# Altium PCB LEOPARD_HD4.PcbDoc (part 2 of 3)
Units mil, origin at the board's own origin, x right, y up, seen from the top; angles counter-clockwise.
Board outline 2678.03 x 1898.03 mil, 4 copper layers (L1, L2, L3, L4), stack 207.302 mil thick; 147 components, 116 nets, 618 pads, 284 vias.
Unrouted connection lines stored in the file: 3.
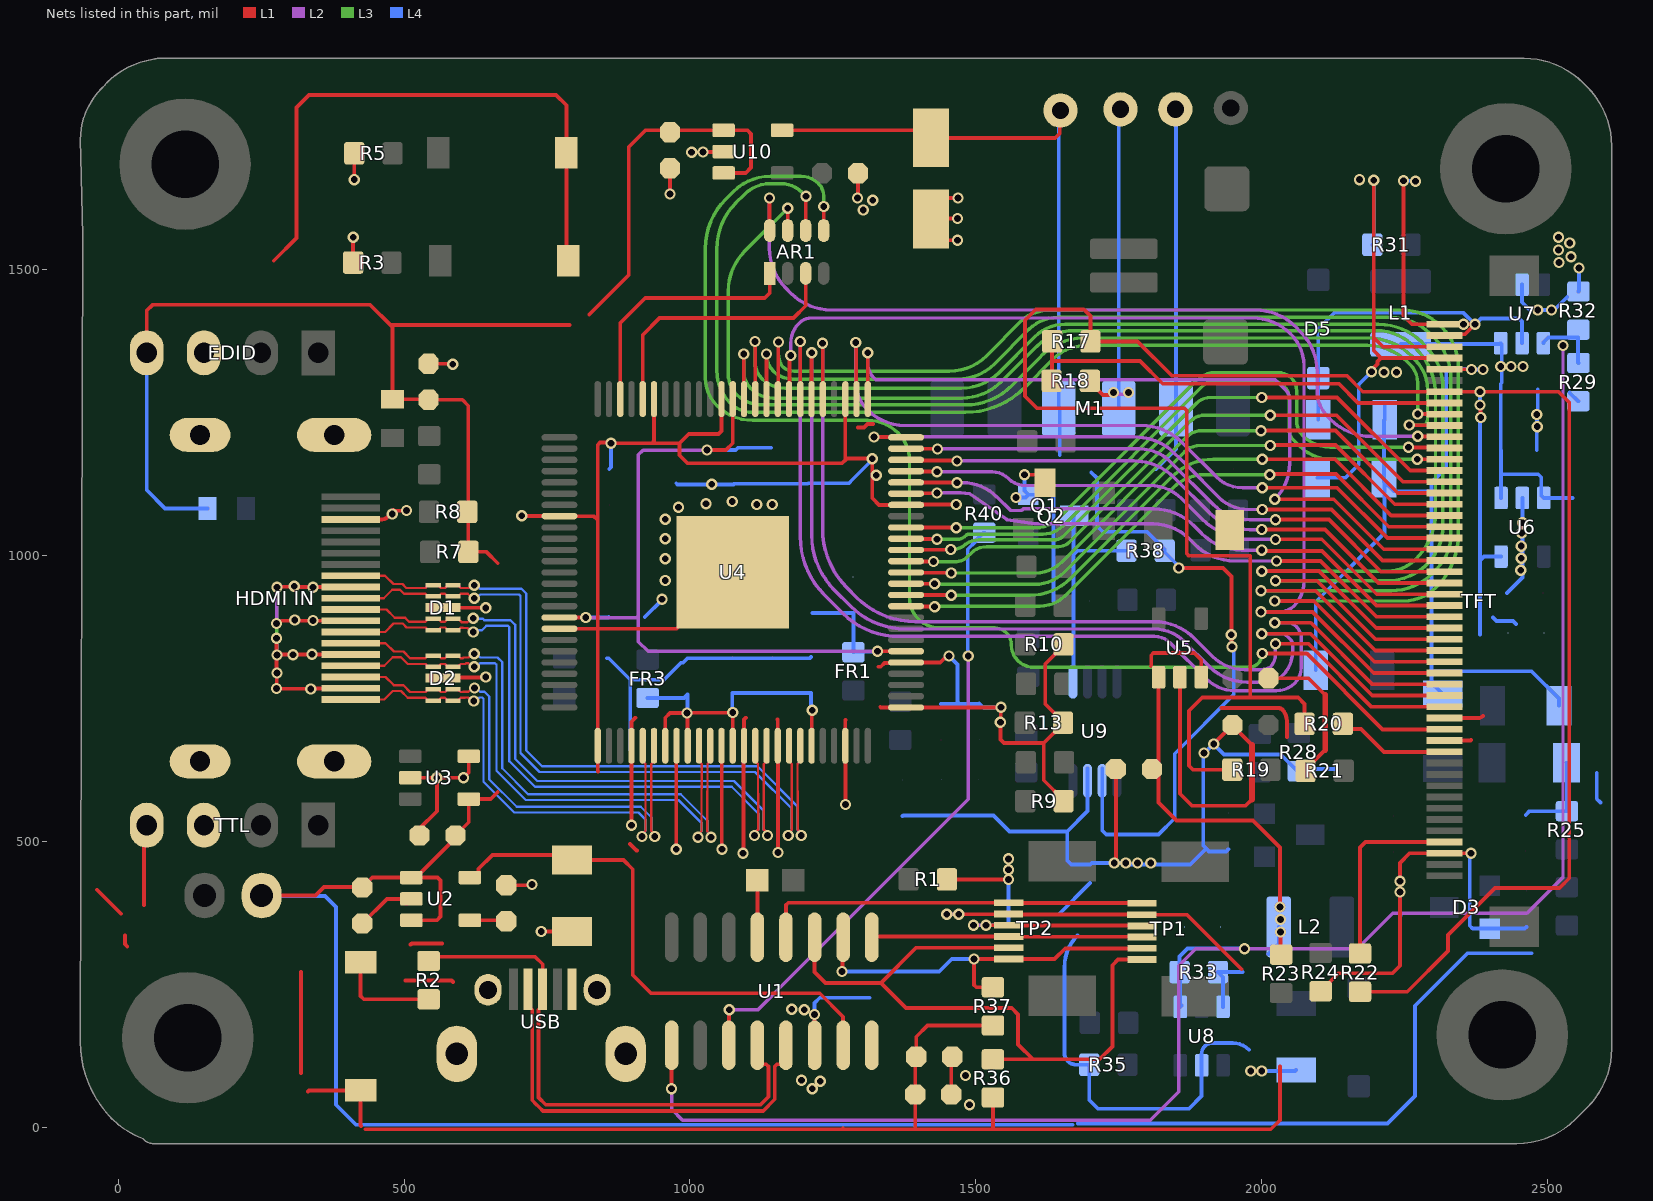
[diagram p4: the nets of this part, all layers, seen from the top]

## Via types
v1: diameter 19.68, hole 11.81, L1 to L4, tented both sides, 252 vias
v2: diameter 39.37, hole 27.56, L1 to L4, tented both sides, 32 vias

## Nets (pads, with @x,y where several pads share a name; then routed paths per layer and width w, separated by ;. In a path a pad name is that pad's centre, name@x,y a point inside that pad or via, vN(x,y) a via of type N, cw(c..) or ccw(c..) an arc to the next point about the centre after c; other vN are vias at no path point)
3V3L: C31.1 R17.2 R19.1 R20.2 R22.2 TFT.7 U6.5 | length 4323.9
  L1 w6.64: R19.1@1948.54,626.97 R19.1@1948.54,625 1880,625 1873,632 1873,728 1896,751 1980,751 ; R20.2@2075,705 2075,740 2064,751 1980,751 ; R22.2@2172,236.54 2254.54,236.54 2326,308 2326,336 2408,418 2521,418 2538,435 2538,1267 2518.92,1286.08 TFT.7@2319.54,1286.08 2176.92,1286.08 2149,1314 1843,1314 1783,1374 R17.2@1700.46,1374 1700.46,1418.54 1689,1430 1605,1430 1586,1411 1586,1278 1607,1257 1865.11,1257 1869,1253.11 1869,1002.89 1872.89,999 1980,999 1980,751 ; v1(2382,1263) 2382.5,1262.5 2382.5,1241.5 v1(2383,1241)
  L4 w6.64: 2382,861.27 2382,991 ; v1@2382,1241 2382,991 ; v1(2382,1263) v1(2382,1286) ; 2404.66,891.17 2410.66,885.17 2439.38,885.17 2444.66,879.9 ; U6.5@2418.6,997.82 2388.82,997.82 2382,991
3V3M: BOOT.2 C1.1 C2.1 C3.1 OFF/ON.1 R36.2 R37.2 RST.2 TP1.5 TP2.5 TTL.4 U1.15 U1.16 U2.5 | length 5139.6
  L1 w6.64: -37,415 5,373 ; 12,335 12,319.89 15.89,316 ; 45,388 45,489 TTL.4@50,494 ; 272,1515 312,1555 312,1783 334,1805 766,1805 784,1787 RST.2@784,1704 784,1525 OFF/ON.1@794,1515 ; 320,94 320,271 ; 332,62 334,64 BOOT.2@424,64 424,3 425,2 ; 432,-4 1266,-4 ; U2.5@615.18,436.4 621.97,436.4 630.47,444.89 630.47,451.69 654.78,476 785,476 C3.1@794,467 884,467 900,451 900,266 932,234 1227,234 1268,193 U1.15@1268,143 ; 1268,-2 1266,-4 ; v1(1470,372) 1470.2,372.2 1557.2,372.2 TP2.5@1557.4,372.4 1557.9,371.9 1789.9,371.9 TP1.5@1790.4,371.4 1869.6,371.4 1965,276 ; R36.2@1530,51.54 1530,-3 1529,-4 ; R37.2@1530,177.54 1415.54,177.54 1396,158 C1.1@1396,123 1394,121 C2.1@1394,57 1394,-2 1396,-4 ; 2032,106 2032,12 2016,-4 1529,-4 ; 1266,-4 1396,-4 ; 1396,-4 1529,-4
  L2 w6.64: v1(1449,372) v1(1470,372)
4.2V: C49.1 C53.1 M1.3 pad.5 R38.1 U9.6 U10.5 | length 2248.4
  L1 w6.64: U10.5@1161.18,1743.4 1408.46,1743.4 C53.1@1422,1729.87 1638.87,1729.87 1647,1738 pad.5@1648,1778 ; v1(1855,977.84) 1932.16,977.84 1947,963 v1(1947,861) 1947,841 v1(1948,840)
  L4 w6.64: pad.5@1645,1798 M1.3@1645,1257 1647,1255 1647,1175 ; 1702,1145 1712,1135 1712,1051 1722,1041 1799.43,1041 1830.46,1009.97 R38.1@1830.46,1008 1830.46,1005.43 1855,980.89 v1(1855,977.84) ; U9.6@1721.18,627 1721.18,518.81 C49.1@1722.99,517 1728.26,511.73 1819.73,511.73 1848,540 1848,653 1951,756 v1@1951,840
5.0V: C4.1 C6.1 C7.2 C28.1 C32.1 C42.2 C45.1 C54.1 EDID.4 J1.1 J2.2 L1.2 L2.1 R7.2 R8.2 R23.1 R29.1 R33.2 U2.1 U2.3 U3.4 U5.1 U5.3 U6.1 U6.3 U7.6 U8.6 U10.1 U10.3 VCC_USB.2 | length 7588.6
  L1 w6.64: EDID.4@50,1354 50,1428 60,1438 441,1438 476.5,1402.5 ; VCC_USB.2@251,405 345,405 360,420 425.99,420 C4.1@427,418.99 444.41,436.4 U2.1@512.82,436.4 U2.1@520.69,436.4 ; U2.3@512.82,361.6 557.6,361.6 564,368 564,431 558.6,436.4 U2.1@520.69,436.4 ; 664,586 651.6,573.6 U3.4@613.18,573.6 613.18,533.18 C7.2@590,510 590,505.71 U2.1@520.69,436.4 ; 664,986 644,1006 R7.2@612.46,1006 612.46,1261.54 602,1272 C6.1@543,1272 542.25,1272.75 J1.1@480,1272.75 480,1399 476.5,1402.5 ; 789.5,1402.5 476.5,1402.5 ; 824,1421 893,1490 893,1714 922.4,1743.4 U10.1@1058.82,1743.4 1100.6,1743.4 1107,1737 1107,1678 1097.6,1668.6 U10.3@1058.82,1668.6 ; 1806,806 1807,807 1807,825.11 1810.89,829 1882,829 1894.4,816.6 U5.3@1894.4,786.82 ; U5.1@1819.6,786.82 1819.6,567.4 1851,536 1985,536 2032,489 v1(2032,385) ; v1(2033,341) 2033,302.46 R23.1@2034,301.46
  L4 w6.64: EDID.4@50,1354 50,1114 82,1082 J2.2@156.25,1082 ; VCC_USB.2@251,405 252,404 362,404 381,385 381,39 416,4 1669,4 ; 1645,372 1700,427 ; 1679,6 2220,6 2268,54 2268,212 2360,304 2472,304 ; U8.6@1932.4,210.18 1932.4,262.06 R33.2@1923.46,271 1966.85,271 ; L2.1@2011.71,302.42 2029.88,320.6 L2.1@2029.88,350 ; L1.2@2243,1368.88 2243.81,1369.69 2416.69,1369.69 U7.6@2418,1371 2420,1369 2420,1302 2418,1300 C32.1@2418,1184 2418.6,1183.4 2418.6,1141.79 ; U6.1@2418.6,1100.18 2418.6,1141.79 ; R29.1@2538.81,1284.72 2538.81,1283.85 2553.13,1269.54 R29.1@2554,1269.54 ; 2543.82,1100.18 U6.3@2493.4,1100.18 2489,1104.58 2489,1136.52 2483.73,1141.79 2418.6,1141.79 ; 2586,619 2586,574 2592.5,567.5
  other v1: 2033,363 2418,1330 2436,1330 2457,1330
AMP_EN: R40.1 U1.11 | length 1112.6
  L1 w6.64: U1.11@1068,143 1068.5,143.5 1068.5,204.5 v1(1069,205)
  L2 w6: 1147,233 1487,573 v1(1487,824)
  L2 w6.64: v1(1069,205) 1119,205 1147,233
  L4 w6.64: v1(1487,824) 1486,825 1486,1010.54 1499.32,1023.85 1499.32,1025.22 1513.63,1039.54 R40.1@1515,1039.54
AVDD: C19.1 C20.1 C21.1 C22.1 FR3.2 U4.82 U4.84 U4.88 U4.95 | length 658.7
  L1 w6.64: U4.82@956.89,666.85 956.89,715.89 965,724 v1(995,724) ; U4.84@996.26,666.85 995.63,667.48 995.63,723.37 v1(995,724) ; U4.88@1075,666.85 v1(1075,725) 1074.5,724.5 995.5,724.5 v1(995,724) ; U4.95@1212.8,666.85 1213.18,667.24 1213.18,728.17 v1(1214,728.99)
  L4 w6.64: FR3.2@926,750.54 989.54,750.54 C22.1@996,757 996,725 v1(995,724) ; v1(1075,725) 1074,726 C21.1@1074,759 C19.1@1212,759 1212,730.99 v1(1214,728.99)
BL_GND: C44.2 R30.2 R31.2 TFT.3 TFT.4 | length 955.4
  L1 w6.64: v1(2192,1321) 2192,1323.89 2202.5,1334.39 2202.5,1338.77 2208.86,1345.14 ; v1(2196,1656) 2196,1381 ; TFT.4@2319.54,1345.14 2208.86,1345.14 ; TFT.3@2319.54,1364.82 2212.18,1364.82 2196,1381 ; 2196,1381 2196,1358 2208.86,1345.14
  L4 w6.64: R30.2@2097.8,1135.54 2146.73,1135.54 2169.84,1158.65 2169.84,1298.84 v1(2192,1321) ; R31.2@2193.54,1543 2196,1545.46 v1(2196,1656)
  other v1: 2214,1320 2236,1320 2171,1657
BL_VCC: C43.1 C44.1 D5.1 TFT.1 TFT.2 U7.5 | length 1029.4
  L1 w6.64: v1(2248,1655) 2248,1419 2262.81,1404.19 TFT.1@2319.54,1404.19 2319.64,1404.1 2372.9,1404.1 v1(2373,1404) 2355.63,1386.63 2321.67,1386.63 TFT.2@2319.54,1384.51
  L4 w6.64: C43.1@2099.13,1237.19 2099,1237.32 2099,1396 2127,1424 2353,1424 v1(2373,1404) 2373.61,1404 2383.61,1414 2450.13,1414 2455.4,1408.73 U7.5@2455.4,1371 ; v1(2248,1655) 2268,1655 v1(2269,1654)
  other v1: 2353,1404
BOOT: BOOT.1 R2.1 | length 181.7
  L1 w6.64: BOOT.1@425,289 BOOT.1@424,288 424,229 429.46,223.54 R2.1@543,223.54
CTP_INT: TP1.3 TP2.3 U1.1 | length 473.7
  L1 w6.64: U1.1@1318,331.98 1319.42,333.4 TP2.3@1557.7,333.4 1558.2,332.9 1790.2,332.9 TP1.3@1790.7,332.4
CTP_RST: TP1.6 TP2.6 U1.4 | length 681
  L1 w6.64: U1.4@1168,331.98 1168,388.41 1171.89,392.3 TP2.6@1557.5,392.3 1558,391.8 1790,391.8 TP1.6@1790.5,391.3
CTP_SCL: R37.1 TP1.2 TP2.1 U1.2 | length 682.5
  L1 w6.64: v1(1266,272) 1267,273 1267,330.98 U1.2@1268,331.98 ; R37.1@1530,244.46 1500.89,244.46 1497,248.35 v1(1497,294) v1(1497,294) 1557.55,293.95 TP2.1@1557.6,293.9 1637.9,293.9 1656.5,312.5 TP1.2@1790.6,312.5
  L4 w6.64: v1(1266,272) 1436,272 1458,294 v1(1497,294)
CTP_SDA: R36.1 TP1.1 TP2.2 U1.3 | length 1203.1
  L1 w6.64: U1.3@1218,331.98 1218,271 1237,252 1334,252 ; R36.1@1530,118.46 1600,118.46 ; TP2.2@1556.85,312.75 TP2.2@1557.6,313.5 1395.5,313.5 1334,252 ; TP1.1@1790.6,292.9 1748.9,292.9 1739,283 1739,141 1716.46,118.46 1600,118.46 ; 1334,252 1378,208 1563,208 1574,197 1574,144.46 1600,118.46
CTRL: Q2.3 R38.2 U9.1 | length 356.2
  L4 w6.64: 1671.02,808.67 1671.02,1001 ; Q2.3@1672,1069 1671.02,1068.02 1671.02,1001 ; R38.2@1763.54,1008 1678.02,1008 1671.02,1001
DATA_N: U1.13 USB.2 | length 745.1
  L1 w6.35: USB.2@716.82,241 716.82,212.37 724.08,205.11 724.08,46.92 730.56,40.44 736.58,34.42 743.06,27.94 1128.05,27.94 1148.53,48.42 1148.53,106.06 1152.25,109.78 1160.02,109.78 1168,117.76 U1.13@1168,143
DATA_P: R2.2 U1.12 USB.3 | length 960.1
  L1 w6.35: R2.2@543,290.46 550.54,298 729,298 742.41,284.59 USB.3@742.41,241 742.41,212.37 735.14,205.11 735.14,51.5 747.64,39 1123.47,39 1137.47,53 1137.47,106.06 1133.75,109.78 1125.98,109.78 1118,117.76 U1.12@1118,143
DE: AR1.3 U4.46 | length 475
  L1 w6.64: U4.46@917.52,1273.15 917.52,1385.52 947,1415 1181,1415 1202.5,1436.5 AR1.3@1202.5,1493
DIHTB: R22.1 TFT.47 | length 337.1
  L1 w6.64: R22.1@2172,303.46 2172,489 2181.68,498.68 TFT.47@2319.54,498.68
EN_BLK: R29.2 R32.2 R33.1 U1.9 U7.4 U8.4 | length 3235.3
  L1 w6.64: v1(968,67) U1.9@968,143
  L2 w6: v1(968,67) 968,31 987,12 1805,12 1855,62 1855,282 1885,312 v1(1970,312) 2167,312 2229,374 2464,374 2527,437 v1(2527,1367)
  L4 w6.64: U8.4@1860.07,212.65 U8.4@1857.6,210.18 1857.6,269.94 R33.1@1856.54,271 1856.54,298.54 1870,312 v1(1970,312) ; U7.4@2492.8,1371 2492.8,1372.51 2501.3,1381 2553,1381 2553.5,1380.5 2553.5,1336.96 R29.2@2554,1336.46
GND: "HDMI IN.2" "HDMI IN.5" "HDMI IN.8" "HDMI IN.11" "HDMI IN.17" "HDMI IN.20" C1.2 C2.2 C3.2 C4.2 C5.2 C6.2 C7.1 C8.2 C9.2 C10.2 C11.2 C12.2 C13.2 C14.2 C15.2 C16.2 C17.2 C18.2 C19.2 C20.2 C21.2 C22.2 C23.2 C24.2 C25.2 C26.2 C27.2 C28.2 C29.2 C30.1 C31.2 C32.2 C33.2 C34.1 C35.1 C36.1 C37.1 C38.1 C39.2 C42.1 C43.2 C45.2 C47.2 C48.2 C49.2 C51.2 C53.2 C54.2 C55.2 D1.3 D2.3 D3.2 DZ1.2 DZ2.1 EDID.3 M1.4 pad.4 Q1.C Q2.2 R1.2 R3.1 R5.1 R9.1 R10.1 R13.1 R18.2 R21.2 R24.1 R25.1 R28.1 R30.1 R32.1 R35.1 TFT.5 TFT.36 TFT.38 TFT.48 TP1.4 TP2.4 TTL.3 U1.14 U2.2 U3.2 U3.5 U4.1 U4.5 U4.19 U4.28 U4.39 U4.45 U4.58 U4.68 U4.76 U4.79 U4.83 U4.87 U4.89 U4.92 U4.98 U4.101 U5.2 U6.2 U7.2 U8.2 U9.7 U10.2 USB.5 USB.6 | length 15303.1
  L1 w6.64: v1(277,855) 277,794 277.5,793.5 277.5,767.5 v1(277,767) 277.5,766.5 336.01,766.5 336.51,767 336.76,766.75 406.3,766.75 407.05,767.49 ; v1(277,880.5) 280.53,880.5 285.63,885.6 407.05,885.6 ; v1(277.78,825.78) 278.55,826.55 407.05,826.55 ; v1(278,944) 279,945 307.66,945 308,944.66 407.05,944.66 ; 407.05,1062.77 461.77,1062.77 462,1063 ccw(c462,1075.07) 470.54,1066.54 v1@479,1075 ; R3.1@411,1512 v1(411,1556) ; v1(413,1657) R5.1@413,1703 ; C4.2@427,356 470,399 U2.2@512.82,399 U2.2@504.33,390.51 ; v1@481,1079 ccw(c483.41,1081.41) 483.41,1078 v1@502,1078 ; U3.2@510.82,611 v1(557.41,611) ; C7.1@527.01,510 527.01,522.01 557.41,552.41 v1(557.41,611) ; C6.2@543,1334.99 584.01,1334.99 v1(585,1334) ; D2.3@568.22,785.32 569.07,786.16 642.16,786.16 v1(643,787) ; D1.3@568.22,908.32 568.38,908.16 642.84,908.16 v1(643,908) ; U3.5@613.18,648.4 613.18,620.18 v1(604,611) v1(557.41,611) ; C5.2@679,422.99 722.99,422.99 v1(724,424) ; v1(706,1069) 706.29,1068.71 771.56,1068.71 U4.58@771.85,1068.43 831.57,1068.43 838.78,1061.22 ; v1(740,342) C3.2@794,342 ; U4.68@771.85,871.57 838.78,871.57 ; 839,622 838.78,622.22 U4.76@838.78,666.85 838.78,871.57 ; v1(898,528) 897.92,528.08 897.92,666.77 U4.79@897.84,666.85 897.84,708.84 905,716 ; U4.45@937.2,1273.15 937.2,1199.89 933.32,1196 ; v1(965,1632) C54.2@965,1677 ; v1(976,486) 976.29,486.29 976.29,666.56 U4.83@976.57,666.85 ; v1(1023,1705.5) 1058.32,1705.5 U10.2@1058.82,1706 ; U4.87@1055.31,666.85 1055.66,666.51 1055.66,486.34 v1(1056,486) ; U4.39@1055.32,1273.15 1055.32,1217.32 1050,1212 998,1212 982,1196 ; U4.101@1075,970 976.57,871.57 838.78,871.57 ; v1(1093,479) 1093.85,479.85 1093.85,666.01 U4.89@1094.69,666.85 1094.69,712.68 1098,716 ; 1153,713 1153.74,712.26 U4.92@1153.74,666.85 1153.87,666.72 1153.87,480.13 v1(1154,480) ; U1.14@1218,143 v1(1218,197) ; U4.28@1271.85,1273.15 1271.85,1166.85 ; v1(1272,564) 1271.93,564.07 1271.93,666.78 U4.98@1271.85,666.85 1271.85,711.85 1272,712 ; v1(1293,1625) 1294,1626 C55.2@1294,1668 ; 1330,805 1333.75,805 1340.43,811.68 1377.31,811.68 U4.5@1378.15,812.52 1437.99,812.52 1449.47,824 v1(1453,824) ; 1333,735 1334.22,733.78 U4.1@1378.15,733.78 1378.26,733.89 1543.89,733.89 v1(1544,734) 1543.5,733.5 1543.5,708.5 v1(1543,708) 1543,678 1549.43,671.57 1619,671.57 ; R1.2@1449.46,433 v1@1556,433 ; C2.2@1456.99,57 1456.99,121 C1.2@1458.99,123 ; v1(1466,1089) 1465.56,1088.55 1378.6,1088.55 U4.19@1378.15,1088.11 1330.89,1088.11 1319,1100 v1(1319,1169) 1274,1169 1271.85,1166.85 ; v1(1468,1551) 1450.18,1551 1422,1579.18 C53.2@1422,1588.13 ; v1(1468,1589) 1422.87,1589 C53.2@1422,1588.13 ; v1(1469,1625) 1450.18,1625 1422,1596.82 C53.2@1422,1588.13 ; v1(1518,353) 1518.1,352.9 1557.4,352.9 TP2.4@1557.5,352.8 1558,352.3 1790,352.3 TP1.4@1790.5,351.8 ; v1(1585,1141) 1607,1141 Q1.C@1621,1127 ; R9.1@1653.46,570 1653.46,571.97 1619,606.43 1619,671.57 ; R10.1@1653.46,844 1653.46,842.03 1621.46,810.03 1621.46,739.97 1652.46,708.97 R13.1@1652.46,707 1652.46,705.03 1619,671.57 ; R18.2@1699.46,1305 1699.46,1303.63 1722.6,1280.5 1733.49,1280.5 1737.47,1284.48 v1(1741,1284.48) ; v1(1742,462) 1745.01,465.01 C28.2@1745.01,626 ; U5.2@1857,786.82 1857,583 1878,562 1972,562 1983,573 ; v1(1916,670) C30.1@1949.01,703 1949.01,701.99 1983,668 ; v1(1981,98) v1(2000,98) ; C29.2@2015,785 2082,785 2111,756 ; R21.2@2076.54,623 2076.54,624.97 2111,659.43 ; R24.1@2103,237.54 2104.37,237.54 2118.68,251.85 2118.68,253.22 2134.46,269 2229,269 2242,282 v1(2242,411) v1(2242,430) ; v1@2241.5,429.5 v1(2242,430) ; TFT.38@2319.54,675.84 2363.21,675.84 ccw(c2363.21,679.79) 2366,677 ; TFT.36@2319.54,715.21 2377.86,715.21 ccw(c2377.86,728.14) 2387,719 ; TFT.5@2319.54,1325.45 2319.77,1325.23 2366.77,1325.23 v1(2367,1325) ; v1(2366,479) TFT.48@2319.54,478.99 2258.99,478.99 2242,462 v1(2242,430) ; 838.78,871.57 838.78,1061.22 ; 838.78,1061.22 838.78,1192.78 843,1197 861,1197 v1(862,1196) 933.32,1196 ; 933.32,1196 982,1196 ; 982,1196 982,1175 996,1161 1266,1161 1271.85,1166.85
  L1 w7: 502.49,256.49 579.99,256.49 cw(c579.99,247.99) 586,254 ; 511,319 cw(c515.17,314.83) 515.17,320.73 566,320.73 ; 895.05,495.05 906.5,483.59 907.59,483.59 ; 1294.22,1223.78 1304.78,1223.78 1311,1230 1320,1230 ; 1930.06,732.78 2029.29,732.78 cw(c2029.29,723.29) 2036,730 cw(c2016.69,710.69) 2044,710.69 2044,682
  L1 w10: 1983,573 1983,668 ; 2111,659.43 2111,756
  L2 w6: v1(1741,1284.48) 1743.66,1281.82 1764.34,1281.82 v1(1767,1284.48)
  L2 w6.64: v1(277,880.5) 277.5,881 277.5,943.5 v1(278,944) ; v1(1496,353) v1(1518,353)
  L3 w6.64: v1(277,855) 277.5,855.5 277.5,943.5 v1(278,944)
  L4 w6.64: v1(277,855) 277.39,854.61 277.39,826.16 v1(277.78,825.78) ; C16.2@855,819.99 858.01,819.99 895.68,782.32 ; C17.2@859,1151 862,1154 v1(862,1196) ; 895.68,659.16 895.68,782.32 ; C9.2@921,892 951,922 v1(951,923) ; C14.2@976,1126 977.99,1124.01 v1(1038,1124.01) C11.2@1076,1124.01 1077,1125.01 C8.2@1142,1125.01 1206.01,1125.01 C15.2@1207,1126 1278.01,1126 C13.2@1284,1131.99 1319,1166.99 v1(1319,1169) ; C19.2@1212,821.99 1210,819.99 1145,819.99 1074,819.99 C22.2@996,819.99 987.94,811.93 984.57,811.93 954.96,782.32 895.68,782.32 ; v1(1218,197) 1218,217 1227,226 1314,226 ; C18.2@1372,544 1373.01,545.01 C23.2@1505,545.01 1530.99,545.01 1559,517 C49.2@1660,517 ; C26.2@1439,740 1472,740 ; v1(1453,824) 1468.11,808.89 1468.11,743.89 1472,740 ; v1(1518,353) 1553.11,353 1557,356.89 v1(1557,433) ; v1(1544,734) 1513,734 C24.2@1506,741 1505,740 1472,740 ; v1(1570.5,1101.16) 1587.16,1101.16 Q2.2@1592,1106 1630.73,1106 1636,1100.73 C51.2@1636,920 ; v1(1585,1141) 1585,1113 Q2.2@1590,1108 ; 1678,335 ccw(c1733.53,279.47) 1655,279.47 1655,129.49 ccw(c1675.49,129.49) 1661,115 ccw(c1675.49,129.49) 1675.49,109 R35.1@1698.54,109 1698.54,47.46 1714,32 1873,32 1895,54 U8.2@1895,107.82 1895,127.51 cw(c1915.49,127.51) 1901,142 cw(c1913.07,129.93) 1913.07,147 1949.03,147 cw(c1949.03,106.03) 1978,135 ; U9.7@1695.59,627 1695.59,552.59 C49.2@1660,517 ; M1.4@1750,1257 pad.4@1750,1801 ; C38.1@1942,486.01 1937.99,482 1908,482 1903,487 ; v1(1981,98) 2058.46,98 C48.2@2060.19,99.72 ; C39.2@2094.72,798.81 2094.72,918.72 2215,1039 R30.1@2215,1128.1 ; C36.1@2131,626.01 2068.94,626.01 R28.1@2065,622.07 2063.03,622.07 2033.31,651.79 1934.21,651.79 v1(1916,670) 1898,652 1898,492 1903,487 ; v1(2242,430) 2242,370.99 C47.2@2243,369.99 ; 2251,1266 2215.28,1266 C43.2@2215.28,1237.19 2213.94,1235.86 R30.1@2213.94,1135.54 2213.94,1129.15 R30.1@2215,1128.1 ; DZ2.1@2317,757 2297,777 2297,797 ; v1(2366,479) 2363.96,476.96 2363.96,352.04 2369,347 2459.99,347 C37.1@2463,350.01 ; v1(2387,1325) 2368,1325 2367,1326 2328.27,1326 2323,1320.73 2323,1153 2297,1127 2297,1112 ; C33.2@2429.01,934 2456,960.99 U6.2@2456,1100.18 ; U7.2@2455.4,1473.36 2455.4,1442.6 2469,1429 v1(2483,1429) 2511.69,1429 2534.31,1451.62 ; C34.1@2462,545.99 2468.47,552.46 R25.1@2534,552.46 2534,635.92 DZ1.2@2532.92,637 ; C32.2@2480.99,1184 2480.99,1223.99 v1(2482,1225) 2481.5,1225.5 2481.5,1245.49 v1(2481,1246) 2483,1248 C42.1@2483,1290 ; C35.1@2519.87,736.81 2519.87,749.61 2472.47,797 2297,797 ; R32.1@2554,1461.46 2555,1462.46 v1(2555,1502.54) ; C49.2@1660,517 1660,466 1667,459 1699.99,459 1702.99,462 v1(1762.11,462) 1765.11,459 1875,459 1903,487 ; R30.1@2215,1128.1 2231.1,1112 2297,1112 ; 2297,797 2297,1112
  other v1: 1488.95,39.05 1214,67 1228,80 1195,82 1481.95,90.05 1200,205 1178,206 1557,450 1783,462 1806,462 1557,469 1899,654 337,766 278,794 306,826 339,827 341,886 309,887 341,944 308,946 957,956 2453,974 957,994 2454,995 2454,1016 957,1029 2455,1039 2456,1057 957,1063 479.36,1072.36 504.36,1078.36 980,1084 1117,1089 1144,1089 1028,1090 1074,1094 1326,1140 2507,1429 2520,1512 2541,1522 2519,1534 2539,1546 2519,1556 1303,1604 1320,1621 1003,1705
HDMI0_N: "HDMI IN.9" D1.4 D1.7 U4.91 | length 1217.8
  L1 w4.04: 407.05,905.29 469.1,905.29 483.76,890.63 501.9,890.63 508.72,883.81 537.37,883.81 539.73,886.18 539.73,886.72 541.65,888.63 D1.4@551,888.63 560.35,888.63 562.27,886.72 562.27,886.18 564.63,883.81 571.81,883.81 574.18,886.18 574.18,886.72 D1.7@576.1,888.63 ; D1.7@585.45,888.63 594.8,888.63 600.35,883.08 606.59,883.08 606.82,882.85 610.84,882.85 617.65,889.66 v1(621.03,889.66) ; U4.91@1134.06,666.85 1134.06,639.83 1129.23,635.01 1129.23,587.63 1129.36,587.5 1129.36,520.19 1135.69,513.87 v1(1135.69,510)
  L4 w4.04: v1(621.03,889.66) 621.65,889.04 638,889.04 640.5,886.54 686.09,886.54 694.34,878.29 694.34,643.86 733.16,605.04 1077.16,605.04 1129.36,552.84 1129.36,520.19 1135.69,513.87 v1(1135.69,510)
HDMI0_P: "HDMI IN.7" D1.5 D1.6 U4.90 | length 1213
  L1 w4.04: 407.05,865.92 467.02,865.92 481.68,880.58 497.74,880.58 504.56,873.77 537.37,873.77 539.73,871.4 539.73,870.86 541.65,868.95 D1.5@551,868.95 560.35,868.95 562.27,870.86 562.27,871.4 564.63,873.77 571.81,873.77 574.18,871.4 574.18,870.86 576.1,868.94 594.8,868.94 598.89,873.03 602.43,873.03 602.66,872.81 610.81,872.81 617.62,866 v1(621,866) ; v1(1113,510) 1113,513.87 1119.32,520.19 1119.32,583.34 1119.19,583.47 1119.19,635.01 1114.37,639.83 U4.90@1114.37,666.85
  L4 w4.04: v1(621,866) 623.99,868.99 636.23,868.99 643.73,876.5 681.93,876.5 684.3,874.13 684.3,639.7 729,595 1073,595 1119.32,548.68 1119.32,520.19 1113,513.87 v1(1113,510)
HDMI1_N: "HDMI IN.6" D2.1 D2.10 U4.86 | length 1072.5
  L1 w4.04: 407.05,846.23 467.6,846.23 482.26,831.57 498.91,831.57 510.61,819.86 537.37,819.86 539.73,822.23 539.73,822.77 541.65,824.69 D2.1@551,824.69 560.35,824.69 562.27,822.77 562.27,822.23 564.63,819.86 571.81,819.86 574.18,822.23 574.18,822.77 576.1,824.69 D2.10@585.45,824.69 594.8,824.69 596.71,822.77 596.71,822.23 599.08,819.86 602.64,819.86 604.14,821.36 612.81,821.36 619.13,827.68 v1(623,827.68) ; U4.86@1035.63,666.85 1035.63,639.83 1030.81,635.01 1030.81,588.01 1030.36,587.56 1030.36,517.19 1036.69,510.87 v1(1036.69,507)
  L4 w4.04: v1(623,827.68) 626.87,827.68 633.19,821.36 663.38,821.36 671.64,813.11 671.64,627.36 716.96,582.04 984.16,582.04 1030.36,535.84 1030.36,517.19 1036.69,510.87 v1(1036.69,507)
HDMI1_P: "HDMI IN.4" D2.2 D2.9 U4.85 | length 1055.9
  L1 w4.04: 407.05,806.86 465.52,806.86 480.18,821.52 494.75,821.52 506.45,809.82 537.37,809.82 539.73,807.45 539.73,806.92 541.65,805 D2.2@551,805 560.35,805 562.27,806.92 562.27,807.45 564.63,809.82 571.81,809.82 574.18,807.45 574.18,806.92 576.1,805 D2.9@585.45,805 594.8,805 596.71,806.92 596.71,807.45 599.08,809.82 606.8,809.82 608.3,811.32 612.81,811.32 619.13,805 v1(623,805) ; v1(1014,507) 1014,510.87 1020.32,517.19 1020.32,591.72 1020.77,592.17 1020.77,635.01 1015.94,639.83 U4.85@1015.94,666.85
  L4 w4.04: v1(623,805) 626.87,805 633.19,811.32 659.22,811.32 661.59,808.95 661.59,623.2 712.8,572 980,572 1020.32,531.68 1020.32,517.19 1014,510.87 v1(1014,507)
HDMI2_N: "HDMI IN.3" D2.4 D2.7 U4.81 | length 927
  L1 w4.04: 407.05,787.18 467.6,787.18 482.26,772.52 498.9,772.52 510.61,760.81 537.37,760.81 539.73,763.18 539.73,763.72 541.65,765.63 D2.4@551,765.63 560.35,765.63 562.27,763.72 562.27,763.18 564.63,760.81 571.81,760.81 574.18,763.18 574.18,763.72 576.1,765.63 D2.7@585.45,765.63 594.8,765.63 596.71,763.72 596.71,763.18 599.08,760.81 602.58,760.81 603.13,761.35 612.89,761.35 619.2,767.66 v1(623.08,767.66) ; 932.36,572.36 932.36,518.19 938.69,511.87 v1(938.69,508) ; 932.38,572.38 932.38,635.01 937.2,639.83 U4.81@937.2,666.85
  L4 w4.04: v1(623.08,767.66) 626.96,767.66 633.27,761.35 640.87,761.35 649.13,753.1 649.13,736.19 649,736.06 649,608 696.96,560.04 914.16,560.04 932.36,541.84 932.36,518.19 938.69,511.87 v1(938.69,508)
HDMI2_P: "HDMI IN.1" D2.5 D2.6 U4.80 | length 910.3
  L1 w4.04: 407.05,747.81 465.52,747.81 480.18,762.47 494.74,762.47 506.45,750.77 537.37,750.77 539.73,748.4 539.73,747.86 541.65,745.94 D2.5@551,745.94 560.35,745.94 562.27,747.86 562.27,748.4 564.63,750.77 571.81,750.77 574.18,748.4 574.18,747.86 576.1,745.95 D2.6@585.45,745.95 594.8,745.95 596.71,747.86 596.71,748.4 599.08,750.77 606.74,750.77 607.29,751.31 611.81,751.31 618.12,745 v1(622,745) ; v1(916,508) 916,511.87 922.32,518.19 922.32,576.52 ; U4.80@917.52,666.85 917.52,639.83 922.34,635.01 922.34,576.54
  L4 w4.04: v1(622,745) 625.88,745 632.19,751.31 636.71,751.31 639.08,748.94 639.08,740.35 638.96,740.22 638.96,603.84 692.8,550 910,550 922.32,537.68 922.32,518.19 916,511.87 v1(916,508)
HDMI_N: "HDMI IN.12" D1.1 D1.10 U4.94 | length 1337.5
  L1 w4.04: 407.05,964.34 466.76,964.34 481.42,949.68 497.22,949.68 504.04,942.86 537.37,942.86 539.73,945.23 539.73,945.77 541.65,947.69 D1.1@551,947.69 560.35,947.69 562.27,945.77 562.27,945.23 564.63,942.86 571.81,942.86 574.18,945.23 574.18,945.77 576.1,947.69 594.8,947.69 596.71,945.77 596.71,945.23 599.08,942.86 613.95,942.86 618.77,947.68 v1(623,947.68) ; U4.94@1193.11,666.85 1193.11,639.83 1188.29,635.01 1188.29,587.6 1188.36,587.53 1188.36,520.19 1194.69,513.87 v1(1194.69,510)
  L4 w4.04: v1(623,947.68) 626.87,947.68 633.19,941.36 705.47,941.36 713.72,933.11 713.72,658.48 741.16,631.04 1118.16,631.04 1188.36,560.84 1188.36,520.19 1194.69,513.87 v1(1194.69,510)
HDMI_P: "HDMI IN.10" D1.2 D1.9 U4.93 | length 1322.1
  L1 w4.04: 407.05,924.97 464.68,924.97 479.34,939.63 493.06,939.63 499.88,932.82 537.37,932.82 539.73,930.45 539.73,929.92 541.65,928 D1.2@551,928 560.35,928 562.27,929.92 562.27,930.45 564.63,932.82 571.81,932.82 574.18,930.45 574.18,929.92 576.1,928 594.8,928 596.71,929.92 596.71,930.45 599.08,932.82 611.31,932.82 619.13,925 v1(623,925) ; v1(1172,510) 1172,513.87 1178.32,520.19 1178.32,583.37 1178.25,583.44 1178.25,635.01 1173.43,639.83 U4.93@1173.43,666.85
  L4 w4.04: v1(623,925) 626.87,925 633.19,931.32 701.31,931.32 703.68,928.95 703.68,654.32 737,621 1114,621 1178.32,556.68 1178.32,520.19 1172,513.87 v1(1172,510)
HSY: AR1.1 U4.48 | length 450.5
  L1 w6.64: U4.48@878.15,1273.15 878.15,1406.15 922,1450 1131,1450 1139.5,1458.5 AR1.1@1139.5,1493
L/R: R20.1 TFT.39 | length 208.8
  L1 w6.64: R20.1@2141.93,705 2150.53,696.4 2173.6,696.4 2213.84,656.16 TFT.39@2319.54,656.16 ; R20.1@2143.46,692 2149.74,692 R20.1@2153.02,688.72
LED: LD1.1 U1.5 | length 100
  L1 w6.64: U1.5@1118,331.98 LD1.1@1118,432
LEFT: C50.2 M1.5 pad.3 | length 664.5
  L4 w6.64: C50.2@1815,1151 1850,1186 pad.3@1850,1801
LTDC_B0: TFT.19 U4.10 | length 1070
  L1 w6.64: U4.10@1378.15,910.95 1378.62,910.47 1427.53,910.47 v1(1428,910) ; v1(2014,1141) 2015,1142 2130,1142 2222.14,1049.86 TFT.19@2319.54,1049.86
  L3 w6: v1(1428,910) 1429,911 1611.84,911 ccw(c1611.84,974.16) 1656.5,929.5 1845,1118 cw(c1900.53,1062.47) 1900.53,1141 v1(2014,1141)
LTDC_B1: TFT.18 U4.11 | length 1072.4
  L1 w6.64: U4.11@1378.15,930.63 1378.47,930.32 1456.69,930.32 v1(1457,930) ; v1(2001,1168) 2128,1168 2226.46,1069.54 TFT.18@2319.54,1069.54
  L3 w6: v1(1457,930) 1594.58,930 ccw(c1594.58,1030) 1665.29,959.29 1844.71,1138.71 cw(c1915.42,1068) 1915.42,1168 v1(2001,1168)
LTDC_B2: TFT.17 U4.12 | length 1081.1
  L1 w6.64: U4.12@1378.15,950.32 1378.31,950.16 1427.84,950.16 v1(1428,950) ; v1(2015,1192) 2016,1193 2129,1193 2232.77,1089.23 TFT.17@2319.54,1089.23
  L3 w6: v1(1428,950) 1429,949 1602.59,949 ccw(c1602.59,1022.41) 1654.5,970.5 1864.5,1180.5 cw(c1892.26,1152.74) 1892.26,1192 v1(2015,1192)
LTDC_B3: TFT.16 U4.13 | length 1085.7
  L1 w6.64: U4.13@1378.15,970 1378.65,969.5 1456.5,969.5 v1(1457,969) ; v1(1999,1218) 2129,1218 2238.09,1108.91 TFT.16@2319.54,1108.91
  L3 w6: v1(1457,969) 1604.13,969 ccw(c1604.13,1033.87) 1650,988 1869,1207 ; 1869.03,1207.03 cw(c1895.56,1180.44) 1895.56,1218 v1(1999,1218)
LTDC_B4: TFT.15 U4.14 | length 1090.5
  L1 w6.64: U4.14@1378.15,989.68 1378.49,989.34 1425.66,989.34 v1(1426,989) ; v1(2015,1245) 2131,1245 2247.4,1128.6 TFT.15@2319.54,1128.6
  L3 w6: v1(1426,989) 1466.62,989 ccw(c1466.62,1014.07) 1484.34,996.34 1491.69,1003.69 cw(c1519,976.37) 1519,1015 1644,1015 ccw(c1644,1043.97) 1664.47,1023.47 ; 1664.49,1023.49 1876,1235 cw(c1900.14,1210.86) 1900.14,1245 v1(2015,1245)
LTDC_B5: TFT.14 U4.15 | length 1099.1
  L1 w6.64: U4.15@1378.15,1009.37 1378.47,1009.68 1455.69,1009.68 v1(1456,1010) ; v1(2000,1276) 2132,1276 2259.72,1148.28 TFT.14@2319.54,1148.28
  L3 w6: v1(1456,1010) ccw(c1456,1055.87) 1478.08,1015.67 cw(c1505.45,988.3) 1487.64,1022.66 cw(c1505.45,988.3) 1505.45,1027 1637,1027 ccw(c1637,1051.14) 1654.07,1034.07 1885.5,1265.5 ; 1885.53,1265.53 cw(c1910.85,1240.15) 1910.85,1276 v1(2000,1276)
LTDC_B6: TFT.13 U4.16 | length 1147.2
  L1 w6.64: U4.16@1378.15,1029.05 1378.68,1028.53 1431.47,1028.53 v1(1432,1028) ; v1(2272,1168) TFT.13@2319.54,1167.97
  L3 w6: v1(1432,1028) 1467.51,1028 ccw(c1467.51,1048.49) 1482,1034 cw(c1489.24,1026.76) 1489.24,1037 1617,1037 ccw(c1617,1087.7) 1652.83,1051.83 1898.93,1297.93 cw(c1916,1280.86) 1916,1305 2017.27,1305 cw(c2017.27,1274.27) 2038.98,1296.02 cw(c2017.27,1274.27) 2048,1274.27 2048,1220.31 ccw(c2075.31,1220.31) 2055.99,1201.01 2065.67,1191.33 ccw(c2122,1247.67) 2122,1168 v1(2272,1168)
LTDC_B7: TFT.12 U4.17 | length 1144.5
  L1 w6.64: U4.17@1378.15,1048.74 1378.52,1048.37 1465.63,1048.37 v1(1466,1048) ; v1(2257,1189) 2257.67,1188.33 2318.87,1188.33 TFT.12@2319.54,1187.66
  L3 w6: v1(1466,1048) 1604,1048 ccw(c1604,1105.94) 1644.97,1064.97 1886,1306 cw(c1918.59,1273.41) 1918.59,1319.5 2029.42,1319.5 cw(c2029.42,1287.92) 2051.75,1310.25 cw(c2029.42,1287.92) 2061,1287.92 2061,1235.56 ccw(c2098.56,1235.56) 2072,1209 ccw(c2120.28,1257.28) 2120.28,1189 v1(2257,1189)
LTDC_CLK: AR1.5 TFT.37 | length 2335.4
  L1 w6.64: AR1.5@1233.99,1567.99 v1(1234,1610) ; v1(2001,828) 2079,828 2211.47,695.53 TFT.37@2319.54,695.53
  L3 w6: v1(1234,1610) 1234,1628.27 ccw(c1203.27,1628.27) 1225,1650 ccw(c1193.62,1618.62) 1193.62,1663 1141.18,1663 ccw(c1141.18,1570.82) 1076,1636 1062.65,1622.65 ccw(c1148.73,1536.58) 1027,1536.58 1027,1310.28 ccw(c1095.28,1310.28) 1047,1262 ccw(c1109.77,1324.77) 1109.77,1236 1310.89,1236 cw(c1310.89,1160.89) 1364,1214 cw(c1315.72,1165.72) 1384,1165.72 1384,926 ccw(c1437,926) 1437,873 1533,873 cw(c1533,844) 1562,844 ccw(c1602,844) 1602,804 1977,804 ccw(c1977,828) v1(2001,828)
LTDC_DE: AR1.6 TFT.9 | length 1944.5
  L1 w6.64: AR1.6@1202.5,1567.99 1202.75,1568.24 1202.75,1627.75 v1(1203,1628) ; v1(2273,1247) 2273.14,1246.86 2319.4,1246.86 TFT.9@2319.54,1246.71
  L3 w6: v1(1203,1628) 1196.55,1634.45 ccw(c1159,1596.89) 1159,1650 1141.21,1650 ccw(c1141.21,1584.3) 1094.77,1630.77 1080.53,1616.53 ccw(c1161.49,1535.58) 1047,1535.58 1047,1323.04 ccw(c1127.32,1323.04) 1070.51,1266.27 ccw(c1109.74,1305.46) 1109.74,1250 1481.92,1250 ccw(c1481.92,1395.04) 1584.48,1292.48 1634.69,1342.69 cw(c1693.36,1284.06) 1693.36,1367 2184.58,1367 cw(c2184.58,1267) 2255.29,1337.71 2260,1333 cw(c2228.62,1301.62) 2273,1301.62 v1(2273,1247)
LTDC_G0: TFT.27 U4.20 | length 1015.9
  L1 w6.64: U4.20@1378.15,1107.8 1378.75,1108.4 1431.4,1108.4 v1(1432,1109) ; v1(2025.84,990.03) 2102.97,990.03 2200.62,892.38 TFT.27@2319.54,892.38
  L2 w6: v1(1432,1109) 1474.06,1109 cw(c1474.06,1027.06) 1489.41,1107.55 1554.41,1062.32 1603.42,1055 1810,1055 cw(c1810,965.67) 1873.16,1028.84 1882.68,1019.32 ccw(c1953.39,1090.03) 1953.39,990.03 v1(2025.84,990.03)
LTDC_G1: TFT.26 U4.21 | length 1020.5
  L1 w6.64: U4.21@1378.15,1127.48 1378.39,1127.24 1466.76,1127.24 v1(1467,1127) ; v1(2000,1009) 2001.63,1007.37 2105.63,1007.37 2200.94,912.06 TFT.26@2319.54,912.06
  L2 w6: v1(1467,1127) 1476.64,1127 cw(c1476.64,1041.64) 1509.63,1120.37 cw(c1476.64,1041.64) 1536.99,1102.01 1561.04,1078.32 1579.96,1078.32 1582.73,1081 1811,1081 cw(c1811,982.02) 1880.99,1052.01 1894.71,1038.29 ccw(c1965.42,1109) 1965.42,1009 v1(2000,1009)
LTDC_G2: TFT.25 U4.22 | length 1018.7
  L1 w6.64: U4.22@1378.15,1147.16 1378.73,1146.58 1431.42,1146.58 v1(1432,1146) ; v1(2024,1027.66) 2024.34,1028 2105,1028 2201.25,931.75 TFT.25@2319.54,931.75
  L2 w6: v1(1432,1146) 1528.43,1146 cw(c1528.43,1105.03) 1557.4,1134 ccw(c1586.38,1162.97) 1586.38,1122 1804.58,1122 cw(c1804.58,1043.73) 1859.93,1099.07 1895,1064 ccw(c1982.74,1151.74) 1982.74,1027.66 v1(2024,1027.66)
LTDC_G3: TFT.24 U4.23 | length 1022
  L1 w6.64: U4.23@1378.15,1166.85 1378.99,1166.01 1465.99,1166.01 v1(1467,1165) ; v1(2000,1045) 2111,1045 2204.57,951.43 TFT.24@2319.54,951.43
  L2 w6: v1(1467,1165) 1776.58,1165 cw(c1776.58,1065) 1798.41,1162.59 cw(c1776.58,1065) 1847.29,1135.71 1908.71,1074.29 ccw(c1979.42,1145) 1979.42,1045 v1(2000,1045)
LTDC_G4: TFT.23 U4.24 | length 1023.5
  L1 w6.64: U4.24@1378.15,1186.53 1378.42,1186.27 1432.73,1186.27 v1(1433,1186) ; v1(2024,1062.34) 2117.66,1062.34 2208.88,971.12 TFT.23@2319.54,971.12
  L2 w6: v1(1433,1186) 1786.58,1186 cw(c1786.58,1110.14) 1840.22,1163.78 1915.25,1088.75 ccw(c1979,1152.5) 1979,1062.34 v1(2024,1062.34)
LTDC_G5: TFT.22 U4.25 | length 1136
  L1 w6.64: v1(1322,1207) 1322.39,1206.61 1377.76,1206.61 U4.25@1378.15,1206.22 ; v1(2001,1080) 2122,1080 2211.2,990.8 TFT.22@2319.54,990.8
  L2 w6: v1(1322,1207) 1777.58,1207 cw(c1777.58,1107) 1793.23,1205.77 cw(c1777.58,1107) 1848.29,1177.71 1855.6,1170.4 ccw(c1859.82,1174.66) 1855.97,1170.07 1856.62,1169.52 cw(c1786.58,1086) 1863.64,1163.09 1930.28,1096.44 ccw(c1934.56,1100.65) 1930.82,1095.96 1930.86,1095.93 ccw(c1977.11,1155.11) 1977.11,1080 v1(2001,1080)
LTDC_G6: TFT.21 U4.26 | length 1389.3
  L1 w6.64: v1(1311,1354) 1311.11,1353.89 1311.11,1273.26 U4.26@1311.22,1273.15 ; v1(2023,1098) 2126,1098 2213.51,1010.49 TFT.21@2319.54,1010.49
  L2 w6: v1(1311,1354) 1311,1335.14 ccw(c1345.14,1335.14) 1321,1311 1324.68,1307.32 2023.68,1307.32 2042,1289 cw(c2025.1,1272.1) 2049,1272.1 2049,1160.77 cw(c1960.23,1160.77) v1(2023,1098)
LTDC_G7: TFT.20 U4.27 | length 1313.3
  L1 w6.64: v1(1290,1372) 1290.77,1371.23 1290.77,1273.92 U4.27@1291.54,1273.15 ; v1(2001,1118) 2132,1118 2219.83,1030.17 TFT.20@2319.54,1030.17
  L2 w6: v1(1290,1372) 1290,1304.7 ccw(c1361.7,1304.7) 1311,1254 ccw(c1376.18,1319.18) 1376.18,1227 1789.58,1227 cw(c1789.58,1127) 1860.29,1197.71 1921,1137 ccw(c1966.87,1182.87) 1966.87,1118 v1(2001,1118)
LTDC_HSYNC: AR1.8 TFT.11 | length 1522.4
  L1 w6.64: v1(1139,1625) 1139.25,1624.75 1139.25,1568.24 AR1.8@1139.5,1567.99 ; v1(2273,1208) 2273.33,1207.67 2319.21,1207.67 TFT.11@2319.54,1207.34
  L2 w6: v1(1139,1625) 1139,1537.01 ccw(c1238.01,1537.01) 1168,1467 1176.71,1458.29 ccw(c1247.42,1529) 1247.42,1429 1988.58,1429 cw(c1988.58,1329) 2059.29,1399.71 2067.71,1391.29 cw(c1997,1320.58) 2095,1340.5 cw(c1997,1320.58) 2097,1320.58 2097,1276.89 ; 2097,1276 2097,1276.89 ; v1(2273,1208) 2191.42,1208 cw(c2191.42,1308) 2120.71,1237.29 2117,1241 cw(c2170.11,1294.11) 2097,1276.89
LTDC_R0: TFT.35 U4.30 | length 1708.2
  L1 w6.64: v1(1232,1371) 1232.24,1370.76 1232.24,1273.39 U4.30@1232.48,1273.15 ; v1(2024,845.34) 2081.66,845.34 2192.1,734.9 TFT.35@2319.54,734.9
  L2 w6: v1(1232,1371) 1232,1046.42 ccw(c1377.87,1046.42) 1274.72,943.28 1291.28,926.72 ccw(c1394.42,1029.87) 1394.42,884 1811.58,884 cw(c1811.58,784) 1882.29,854.71 1913.67,823.33 ccw(c1970,879.67) 1970,800 1997.43,800 ccw(c1997.43,837.58) 2014.89,804.3 ccw(c1992.9,826.3) 2024,826.3 v1(2024,845.34)
LTDC_R1: TFT.34 U4.31 | length 1833.9
  L1 w6.64: U4.31@1212.8,1273.15 1212.9,1273.25 1212.9,1353.9 v1(1213,1354) ; v1(2000,862.68) 2085.31,862.68 2193.42,754.58 TFT.34@2319.54,754.58
  L2 w6: v1(1213,1354) 1213,1035.42 ccw(c1349.21,1035.42) 1252.9,939.1 1281.1,910.9 ccw(c1377.42,1007.21) 1377.42,871 1812.06,871 cw(c1812.06,796.3) 1864.88,849.12 1908.49,805.51 ccw(c1974.91,871.93) 1974.96,778 2008.03,778 ccw(c2008.03,818.97) 2037,790 ccw(c1995.96,831.04) 2054,831.04 2054,843.34 ccw(c2040.34,843.34) 2050,853 2043.71,859.29 ccw(c2035.52,851.1) 2035.52,862.68 v1(2000,862.68)
LTDC_R2: TFT.33 U4.32 | length 1925.3
  L1 w6.64: v1(1193,1374) 1193.06,1373.95 1193.06,1273.2 U4.32@1193.11,1273.15 ; v1(2023,882) 2086,882 2193.73,774.27 TFT.33@2319.54,774.27
  L2 w6: v1(1193,1374) 1193,1032.42 ccw(c1336.45,1032.42) 1235.02,930.98 1267.27,898.73 ccw(c1365.6,997.05) 1365.6,858 1812.62,858 cw(c1812.61,818.44) 1840.59,846.41 1902.88,784.12 ccw(c1953.87,835.11) 1953.87,763 2025.53,763 2025.6,763 ccw(c2025.59,808.49) 2057.75,776.32 ccw(c2029.87,804.2) 2069.3,804.2 2069.3,854.97 ccw(c2040.97,854.97) 2061,875 ccw(c2044.1,858.1) 2044.1,882 v1(2023,882)
LTDC_R3: TFT.32 U4.33 | length 1919.4
  L1 w6.64: U4.33@1173.43,1273.15 1174.26,1273.99 1174.26,1347.46 v1(1176.4,1349.6) ; v1(1999,901) 2089,901 2196.05,793.95 TFT.32@2319.54,793.95
  L2 w6: v1(1176.4,1349.6) 1176.4,1370.76 cw(c1226.24,1370.76) 1191,1406 cw(c1212.73,1384.27) 1212.73,1415 1983.4,1415 cw(c1983.4,1319.4) 2051,1387 cw(c1995.47,1331.47) 2074,1331.47 2074,954.46 cw(c2012.54,954.46) 2056,911 cw(c2031.86,935.14) 2031.86,901 v1(1999,901)
LTDC_R4: TFT.31 U4.34 | length 2447.9
  L1 w6.64: U4.34@1153.74,1273.15 1154.37,1273.78 1154.37,1372.37 v1(1155,1373) ; v1(2023,920) 2091,920 2197.36,813.64 TFT.31@2319.54,813.64
  L3 w6: v1(1155,1373) 1155,1353.38 ccw(c1199.38,1353.38) 1161.22,1330.72 ccw(c1182.28,1351.79) 1182.28,1322 1454,1322 ccw(c1454,1413.74) 1518.87,1348.87 1580.72,1410.72 cw(c1616.13,1375.36) 1598,1422 cw(c1635.34,1325.92) 1635.34,1429 2245.4,1429 cw(c2245.4,1333.4) 2313,1401 2314.71,1399.29 cw(c2244,1328.58) 2344,1328.58 2344,1037.12 cw(c2212.11,1037.08) 2305.36,943.82 cw(c2247.84,1001.36) 2247.84,920 ; v1(2023,920) 2247.8,920
LTDC_R5: TFT.30 U4.35 | length 2421.1
  L1 w6.64: U4.35@1134.03,1273.18 v1(1134,1352) ; v1(1999,938) 2094,938 2198.68,833.32 TFT.30@2319.54,833.32
  L3 w6: v1(1134,1352) 1134,1350.97 ccw(c1174.97,1350.97) 1146,1322 ccw(c1179.8,1355.8) 1179.8,1308 1468,1308 ccw(c1468,1399.74) 1532.85,1334.85 1593,1395 cw(c1643.67,1344.38) 1643.67,1416 2226.4,1416 cw(c2226.4,1320.4) 2294,1388 2301.71,1380.29 cw(c2231,1309.58) 2331,1309.58 2331,1036.36 cw(c2245.64,1036.36) 2306,976 2297.29,967.29 cw(c2226.58,1038) 2226.58,938 v1(1999,938)
LTDC_R6: TFT.29 U4.36 | length 2392.6
  L1 w6.64: v1(1114,1374) 1114.18,1373.82 1114.18,1273.33 U4.36@1114.37,1273.15 ; v1(2024,955.34) 2096.66,955.34 2198.99,853.01 TFT.29@2319.54,853.01
  L3 w6: v1(1114,1374) 1114,1337.97 ccw(c1154.97,1337.97) 1126,1309 ccw(c1167.04,1350.04) 1167.04,1292 1473.82,1292 ; 1473.86,1292 ccw(c1473.86,1386.5) 1540.7,1319.7 1603,1382 cw(c1656.11,1328.89) 1656.11,1404 2204.33,1404 cw(c2204.33,1296.92) 2287.71,1364.1 cw(c2217,1293.39) 2317,1293.39 2317,1051.6 cw(c2221.61,1051.6) 2277.2,974.08 cw(c2218.92,1055.34) 2218.92,955.34 v1(2024,955.34)
LTDC_R7: TFT.28 U4.37 | length 2383.8
  L1 w6.64: v1(1094,1352) 1094.34,1351.66 1094.34,1273.49 U4.37@1094.68,1273.15 ; v1(2000,972) 2000.69,972.68 2100.31,972.68 2200.31,872.69 TFT.28@2319.54,872.69
  L3 w6: v1(1094,1352) 1094,1322.38 ccw(c1138.38,1322.38) 1107,1291 ccw(c1145.63,1329.63) 1145.63,1275 1475.27,1275 ccw(c1475.3,1373.27) 1544.8,1303.8 1606.26,1365.26 cw(c1673.23,1298.28) 1673.23,1393 2200.46,1393 2200.52,1393 cw(c2200.5,1301.12) 2270.29,1360.88 2271.75,1359.17 cw(c2193.22,1281.04) 2304,1281.04 2304,1074.58 cw(c2191.36,1074.58) 2268.51,992.51 cw(c2219,1042.01) 2219,972 v1(2000,972)
LTDC_VSYNC: AR1.7 TFT.10 | length 1859.5
  L1 w6.64: AR1.7@1171,1567.99 v1(1171,1607) ; v1(2258,1228) 2258.49,1227.51 2319.06,1227.51 TFT.10@2319.54,1227.03
  L3 w6: v1(1171,1607) 1096.29,1532.29 ccw(c1167,1461.58) 1067,1461.58 1067,1317.21 ccw(c1118.21,1317.21) 1068.64,1304.36 ccw(c1118.21,1317.21) 1082,1281 ccw(c1125.46,1324.46) 1125.46,1263 1482.03,1263 ccw(c1482.06,1376.97) 1562.71,1296.44 1610.36,1344.09 cw(c1688.51,1277.01) 1688.51,1380 2186.16,1380 cw(c2186.16,1272.52) 2269,1341 cw(c2218.3,1290.3) 2290,1290.3 2290,1237.24 cw(c2279.76,1237.24) 2287,1230 cw(c2282.17,1234.83) 2282.17,1228 v1(2258,1228)
MODE: R17.1 R18.1 TFT.8 | length 786.6
  L1 w6.64: R18.1@1632.54,1305 1633.04,1305.5 1633.04,1339.5 ; R17.1@1633.54,1374 1633.04,1373.5 1633.04,1339.5 ; TFT.8@2319.54,1266.4 2168.6,1266.4 2135,1300 1827,1300 1787,1340 1633.54,1340 1633.04,1339.5
NetC5_1: C5.1 U2.4 | length 64.5
  L1 w6.64: U2.4@615.18,361.6 677.4,361.6 C5.1@679,360
NetC8_1: C8.1 C9.1 C10.1 C11.1 C12.1 FR1.2 U4.6 U4.38 U4.67 | length 1529.1
  L1 w6.64: U4.67@771.85,891.26 771.98,891.13 817.87,891.13 v1(818,891) ; v1(1030,1184) 1063,1184 1075,1196 U4.38@1075,1273.15 ; v1(1328,832) 1328.1,832.1 1378.05,832.1 U4.6@1378.15,832.2
  L2 w6: v1(818,891) 906.49,891 910,894.51 ; v1(1030,1184) 918,1184 910,1176 910,894.51 ; v1(1328,832) 927,832 910,849 910,894.51
  L4 w6.64: v1(818,891) 857.01,891 C9.1@858.01,892 ; v1(1030,1184) 1080,1184 1084,1188 C8.1@1142,1188 ; C10.1@1214,899 C12.1@1285,899 1286,898 FR1.2@1286,830.46 1286.77,831.23 1327.23,831.23 v1(1328,832)